# Altium PCB Camera Powersupply Panel.PcbDoc
Units mm, origin at the board's own origin, x right, y up, seen from the top; angles counter-clockwise.
Board outline 200 x 110 mm, 2 copper layers (Top Layer, Bottom Layer), stack 1.621 mm thick; 4 components, 0 nets, 8 pads, 0 vias.
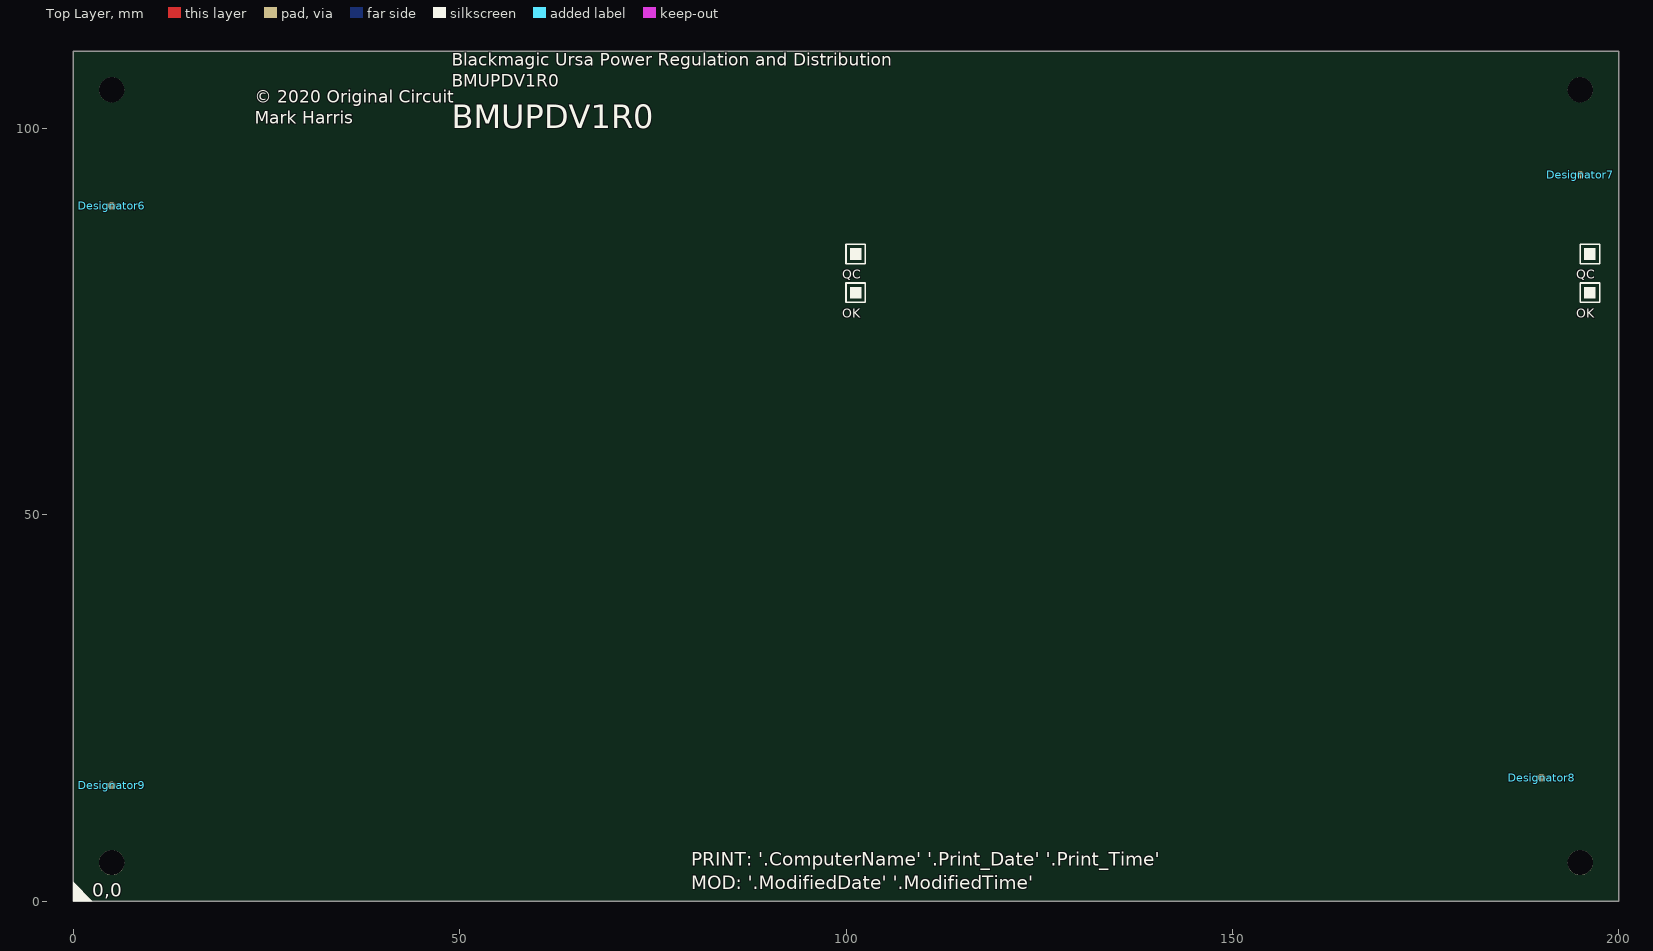
[diagram p0: Top Layer view]
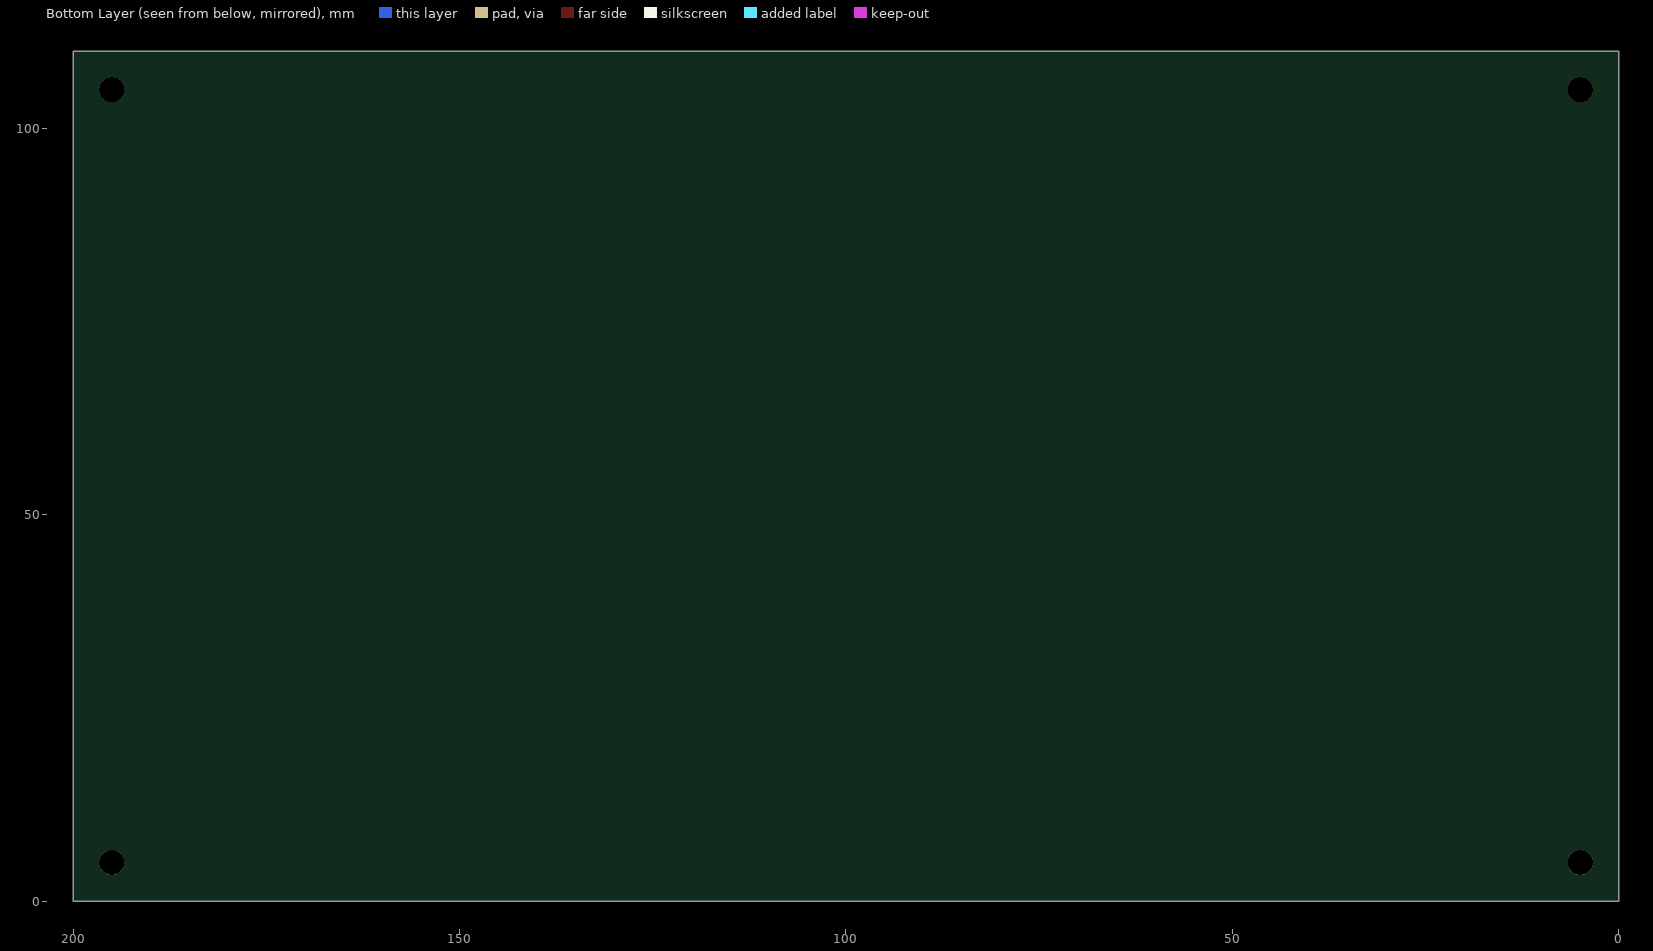
[diagram p1: Bottom Layer view, seen from below]

## Layer stack, top to bottom
Top Solder: solder mask 0.0102, Solder Resist, Dk 3.5
Top Layer: signal copper 0.0356
Dielectric1: core 1.55, FR-4, Dk 4.8
Bottom Layer: signal copper 0.0356
Bottom Solder: solder mask 0.0102, Solder Resist, Dk 3.5

## Board outline
0,0 200,0 200,110 0,110

## Design rules (kind name [scope] priority, off if disabled: settings)
Clearance PadClearance [IsPad vs IsPad] p1: gap=0.2 ignorepadtopadclearanceinfootprint=FALSE except(0: Arc-Hole Track-Hole SMDPad-Hole THPad-Hole Via-Hole Fill-Hole Poly-Hole Region-Hole Text-Hole)
Clearance [All] p2: gap=0.2 ignorepadtopadclearanceinfootprint=FALSE except(0: Arc-Hole Track-Hole SMDPad-Hole THPad-Hole Via-Hole Fill-Hole Poly-Hole Region-Hole Text-Hole)
HoleSize [All] p1: absolutevalues=TRUE maxlimit=6 minlimit=0.4 maxpercent=80.000 minpercent=20.000
HoleToHoleClearance [All] p1: gap=0.2 allowstackedmicrovias=TRUE
MinimumSolderMaskSliver [All] p1: minsoldermaskwidth=0
PolygonConnect ViaConnect [IsVia] p1: connectstyle=Direct reliefconductorwidth=0.254 reliefentries=4 polygonreliefangle="90 Angle" airgapwidth=0.254
PolygonConnect [All] p2: connectstyle=Direct reliefconductorwidth=0.3 reliefentries=4 polygonreliefangle="90 Angle" airgapwidth=0.254
RoutingVias [All] p1: holewidth=0.6 width=1 viastyle="Through Hole" minholewidth=0.4 minwidth=0.8 maxholewidth=5 maxwidth=6
SilkToSilkClearance [All] p1: silktosilkclearance=0
SilkToSolderMaskClearance SilkscreenOverComponentPads [IsPad] p1: minsilkscreentomaskgap=0.05 clearancetoexposedcopper=TRUE
SolderMaskExpansion "Via Tenting" [IsVia] p1: expansion=-2 istentingtop=FALSE
SolderMaskExpansion [All] p2: expansion=0.102 istentingtop=FALSE
Width [All] p1: maxlimit=2 minlimit=0.2 preferedwidth=0.4
25 further rules are at their usual default settings.

## Components (designator, comment, footprint, x,y, rotation, side; value= is the part's Value field where it differs from the comment)
Designator6 "Comment" Fiducial-1mm 5,90 r0 top
Designator7 "Comment" Fiducial-1mm 195,94 r0 top
Designator8 "Comment" Fiducial-1mm 190,16 r0 top
Designator9 "Comment" Fiducial-1mm 5,15 r0 top

## Footprints (in the part's own frame and the unit in brackets; to place one, negate y for a bottom-side part, rotate by r counter-clockwise, add the part's x,y. Pads: shape width x height; smd on the part's side, far side on the other; paste and mask are expansions set on the pad)
Fiducial-1mm [mm]
  round 1 smd paste-1 mask+0.5: F(0,0)
  Top Layer pour cut-out: -1,0 -0.924,0.383 -0.707,0.707 -0.383,0.924 0,1 0,1 0.383,0.924 0.707,0.707 0.924,0.383 1,0 1,0 0.924,-0.383 0.707,-0.707 0.383,-0.924 0,-1 0,-1 -0.383,-0.924 -0.707,-0.707 -0.924,-0.383 -1,0
  Top Layer pour cut-out: 0,0

## Free pads (board coordinates)
  round 3.25 hole 3.25 unplated: M(5,5) M(5,105) M(195,5) M(195,105)

## Nets (pads, with @x,y where several pads share a name; then routed paths per layer and width w, separated by ;. In a path a pad name is that pad's centre, name@x,y a point inside that pad or via, vN(x,y) a via of type N, cw(c..) or ccw(c..) an arc to the next point about the centre after c; other vN are vias at no path point)
pads on no net: Designator6.F Designator7.F Designator8.F Designator9.F

## Silkscreen, mask and mechanical layers (free items; w line width, h text height)
Top Overlay:
  rectangle: 195.5,83 197,84.5
  rectangle: 195.5,78 197,79.5
  rectangle: 100.5,78 102,79.5
  rectangle: 100.5,83 102,84.5
  region: 0,2.5 2.5,0 0,0
  lines w0.2: 100,77.5 102.5,77.5 102.5,80 100,80 100,77.5 ; 100,82.5 102.5,82.5 102.5,85 100,85 100,82.5 ; 195,77.5 195,80 197.5,80 197.5,77.5 195,77.5 ; 195,82.5 195,85 197.5,85 197.5,82.5 195,82.5
  text "Blackmagic Ursa Power Regulation and Distribution / BMUPDV1R0" at 49,104.8 h2.75
  text "© 2020 Original Circuit / Mark Harris" at 23.5,100 h2.75
  text "BMUPDV1R0" at 49,100 h3
  text "QC" at 99.484,80.142 h2
  text "QC" at 194.484,80.142 h2
  text "OK" at 99.484,75.142 h2
  text "OK" at 194.484,75.142 h2
  text "PRINT: '.ComputerName' '.Print_Date' '.Print_Time' / MOD: '.ModifiedDate' '.ModifiedTime'" at 80,1 h3
  text "0,0" at 2.5,0 h3
V Cut:
  lines w0.2: -5,13 204.4,13 ; -5,96.4 204.4,96.4
Fab Notes:
  lines w0.2: -6,28 -6,14 -5,13 ; -6,111.4 -6,97.4 -5,96.4
  text "V SCORE" at -6,98.4 h5 r90
  text "V SCORE" at -6,15 h5 r90
Outlines:
  the board outline again, w0.2

## Panel: embedded boards
"Camera Powersupply Board.PcbDoc" at 8,13, 1 rows x 2 columns, spacing 59 x 95.739, rotation 0